# EAGLE board Pulsmesser_1_2017 (EAGLE 6.6.0)
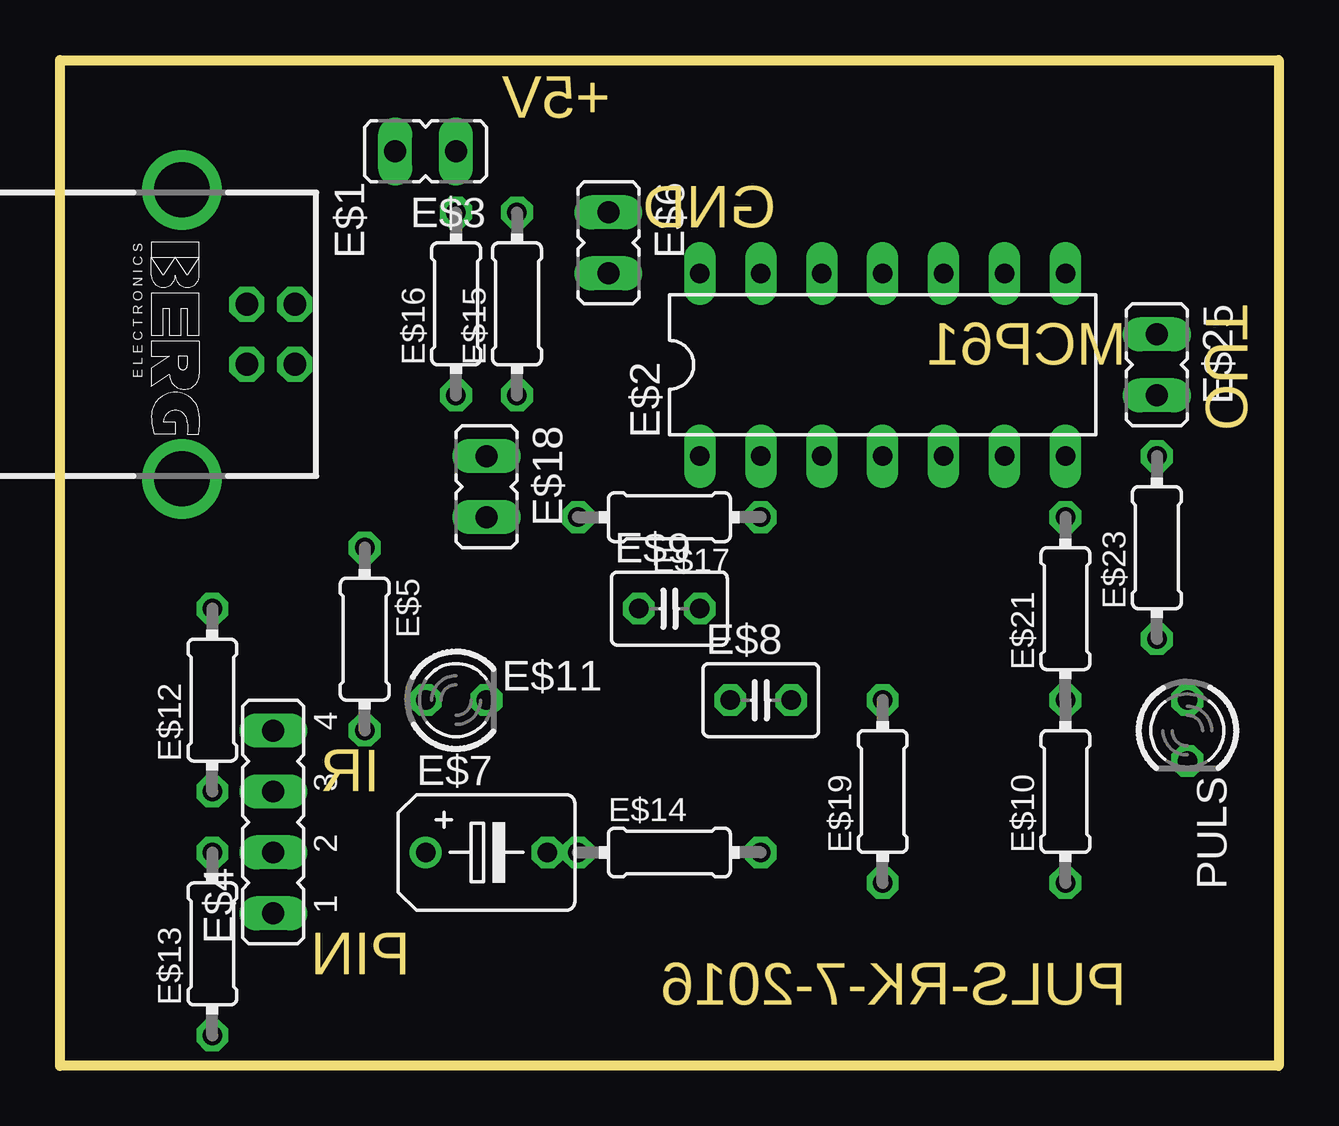
[diagram p0: board, top side]
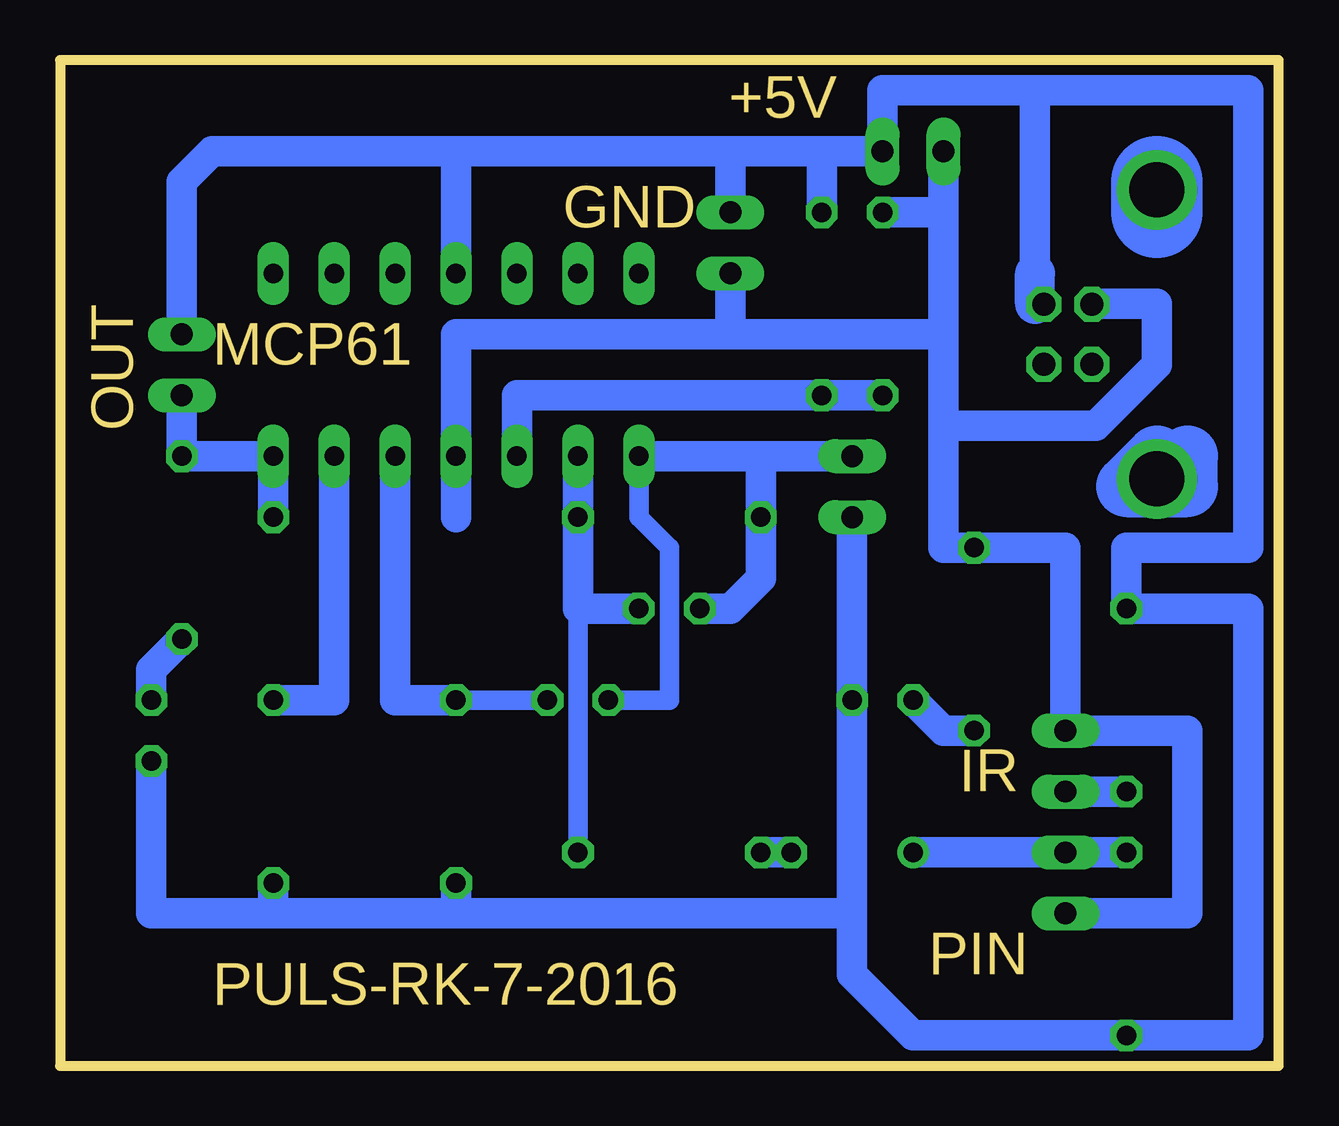
[diagram p1: board, bottom side, seen from below]

Size 50.8 x 41.91 mm. Coordinates in mm from the lower left corner, seen from the top.
Outline: 0,0 0,41.91 50.8,41.91 50.8,0 0,0
Copper layers (1*16): Top 0.035mm / dielectric 1.5mm / Bottom 0.035mm
Design rules "default": minimum track width 10mil, minimum drill 24mil, track to track 8mil, track to pad 8mil, pad to pad 8mil, via to via 8mil, smd to smd 8mil, copper to edge 40mil, drill to drill 8mil, minimum pad ring 10mil, minimum via ring 8mil, stop-mask expansion 4mil, vias tented up to drill 0mil, thermal gap 10mil

## Footprints (pad centres in the part's own frame; a part is rotated, then mirrored left to right if it is on the bottom)
PN61729-S = drill 0.95 octagon: 1 1.25,4.71; 2 -1.25,4.71; 3 -1.25,2.71; 4 1.25,2.71 | drill 2.3 pad 2.9: S1 -6.02,0; S2 6.02,0
DIL14 = drill 0.813 long: 1 -7.62,-3.81; 2 -5.08,-3.81; 3 -2.54,-3.81; 4 0,-3.81; 5 2.54,-3.81; 6 5.08,-3.81; 7 7.62,-3.81; 8 7.62,3.81; 9 5.08,3.81; 10 2.54,3.81; 11 0,3.81; 12 -2.54,3.81; 13 -5.08,3.81; 14 -7.62,3.81
JP1Y = drill 0.914 long: 1 0,-1.27; 2 0,1.27
JP4 = drill 0.914 long: 1 -3.81,0; 2 -1.27,0; 3 1.27,0; 4 3.81,0
0204/7 = drill 0.813 octagon: 1 -3.81,0; 2 3.81,0
B45181B = drill 0.813: + -2.54,0 | drill 0.813 octagon: - 2.54,0
C025-030X050 = drill 0.813 octagon: 1 -1.27,0; 2 1.27,0
LED3MM = drill 0.813 octagon: A -1.27,0; K 1.27,0

## Placement (x,y rotation side)
E$1  [PN61729-S]  5.08,30.48 270 top
E$2  MCP6144  [DIL14]  34.29,29.21 0 top
E$3  [JP1Y]  15.24,38.1 90 top
E$4  [JP4]  8.89,10.16 90 top
E$5  470R  [0204/7]  12.7,17.78 270 top
E$6  [JP1Y]  22.86,34.29 180 top
E$7  [B45181B]  17.78,8.89 0 top
E$8  [C025-030X050]  29.21,15.24 0 top
E$9  2,2nF  [C025-030X050]  25.4,19.05 0 top
E$10  2K2  [0204/7]  41.91,11.43 90 top
E$11  [LED3MM]  16.51,15.24 0 top
E$12  120R  [0204/7]  6.35,15.24 90 top
E$13  50K  [0204/7]  6.35,5.08 90 top
E$14  150K  [0204/7]  25.4,8.89 0 top
E$15  220K  [0204/7]  19.05,31.75 90 top
E$16  220K  [0204/7]  16.51,31.75 90 top
E$17  3,3M  [0204/7]  25.4,22.86 180 top
E$18  [JP1Y]  17.78,24.13 180 top
E$19  4,7M  [0204/7]  34.29,11.43 90 top
E$21  10K  [0204/7]  41.91,19.05 90 top
E$23  220R  [0204/7]  45.72,21.59 90 top
E$25  [JP1Y]  45.72,29.21 180 top
PULS  [LED3MM]  46.99,13.97 270 top

## Library data of the parts
E$1 = con-berg
E$2 = 40xx
E$3 E$4 E$6 E$18 E$25 = jumper
E$5 E$7-E$10 E$12-E$17 E$19 E$21 E$23 = rcl
E$11 PULS = led

## Nets
S$1: E$2.3 E$16.1
S$2: E$2.4 E$3.2 E$4.1 E$4.4 E$6.2 E$16.2
S$3: E$4.3 E$12.1
S$4: E$4.2 E$7.+ E$13.2
S$6: E$7.- E$14.1
S$7: E$2.2 E$9.2 E$14.2
S$10: E$2.1 E$8.1 E$9.1 E$17.2 E$18.1
S$11: E$2.5 E$8.2
S$13: E$2.6 E$21.1
S$14: E$2.7 E$21.2 E$23.2 E$25.2
S$16: E$23.1 PULS.A
S$18: E$2.11 E$3.1 E$6.1 E$10.1 E$12.2 E$13.1 E$15.2 E$18.2 E$19.1 E$25.1 PULS.K
S$19: E$5.2 E$11.A

## Tracks (layer width: path | path; a pad name or v marks a point on that pad's centre or on a via)
S$1
  Bottom 1.27: E$16.1 31.75,27.94 E$2.3
S$2
  Bottom 1.27: E$3.2 13.97,35.56 | 13.97,35.56 13.97,30.48 | 13.97,30.48 22.86,30.48 | 22.86,30.48 34.29,30.48 E$2.4 34.29,22.86 | 13.97,30.48 13.97,26.67 | 13.97,26.67 13.97,21.59 8.89,21.59 E$4.4 3.81,13.97 3.81,6.35 E$4.1 | E$16.2 13.97,35.56 | E$6.2 22.86,30.48 | 13.97,26.67 7.62,26.67 5.08,29.21 5.08,31.75 7.62,31.75
S$3
  Bottom 1.27: E$12.1 E$4.3
S$4
  Bottom 1.27: E$13.2 E$4.2 E$7.+
S$5
  Bottom 3.81: 5.08,36.83 5.08,35.56
S$6
  Bottom 1.27: E$7.- E$14.1
S$7
  Bottom 0.813: E$14.2 29.21,19.05
  Bottom 1.27: E$2.2 29.21,19.05 E$9.2
S$8
  Bottom 2.54: 5.08,24.13 5.08,25.4 6.35,24.13 3.81,24.13 3.81,25.4
S$10
  Bottom 0.813: E$2.1 26.67,22.86 25.4,21.59 25.4,15.24 E$8.1
  Bottom 1.27: E$9.1 22.86,19.05 21.59,20.32 E$17.2 21.59,25.4 | 21.59,25.4 E$2.1 | E$18.1 21.59,25.4
S$11
  Bottom 0.813: E$8.2 34.29,15.24
  Bottom 1.27: 34.29,15.24 36.83,15.24 E$2.5
S$13
  Bottom 1.27: E$21.1 39.37,15.24 E$2.6
S$14
  Bottom 1.27: E$21.2 E$2.7 E$23.2 E$25.2
S$16
  Bottom 1.27: E$23.1 46.99,16.51 PULS.A
S$18
  Bottom 1.27: E$25.1 45.72,36.83 44.45,38.1 34.29,38.1 | PULS.K 46.99,6.35 41.91,6.35 | 19.05,38.1 E$3.1 16.51,40.64 10.16,40.64 | 19.05,38.1 22.86,38.1 | 22.86,38.1 34.29,38.1 | 34.29,38.1 E$2.11 | 10.16,40.64 1.27,40.64 1.27,21.59 6.35,21.59 E$12.2 1.27,19.05 1.27,1.27 E$13.1 15.24,1.27 17.78,3.81 17.78,6.35 | E$15.2 19.05,38.1 | 17.78,6.35 E$18.2 | 41.91,6.35 34.29,6.35 | 34.29,6.35 17.78,6.35 | 10.16,33.02 10.16,40.64 | 22.86,38.1 E$6.1 | E$19.1 34.29,6.35 | E$10.1 41.91,6.35
  Bottom 1.676: 10.16,31.75 10.16,33.02
S$19
  Bottom 1.27: E$5.2 13.97,13.97 E$11.A

## Text on the board
Dimension: +5V | GND | OUT | MCP61 | IR | PIN | PULS-RK-7-2016